# Altium PCB F4SDR2.PcbDoc (part 2 of 3)
Units mil, origin at the board's own origin, x right, y up, seen from the top; angles counter-clockwise.
Board outline 1676.41 x 2432 mil, 6 copper layers (Top Layer, GND1, PWR, PWR2/GND2, Signal Layer 1, Bottom Layer), stack 46.185 mil thick; 213 components, 239 nets, 1245 pads, 805 vias.
Unrouted connection lines stored in the file: 91.
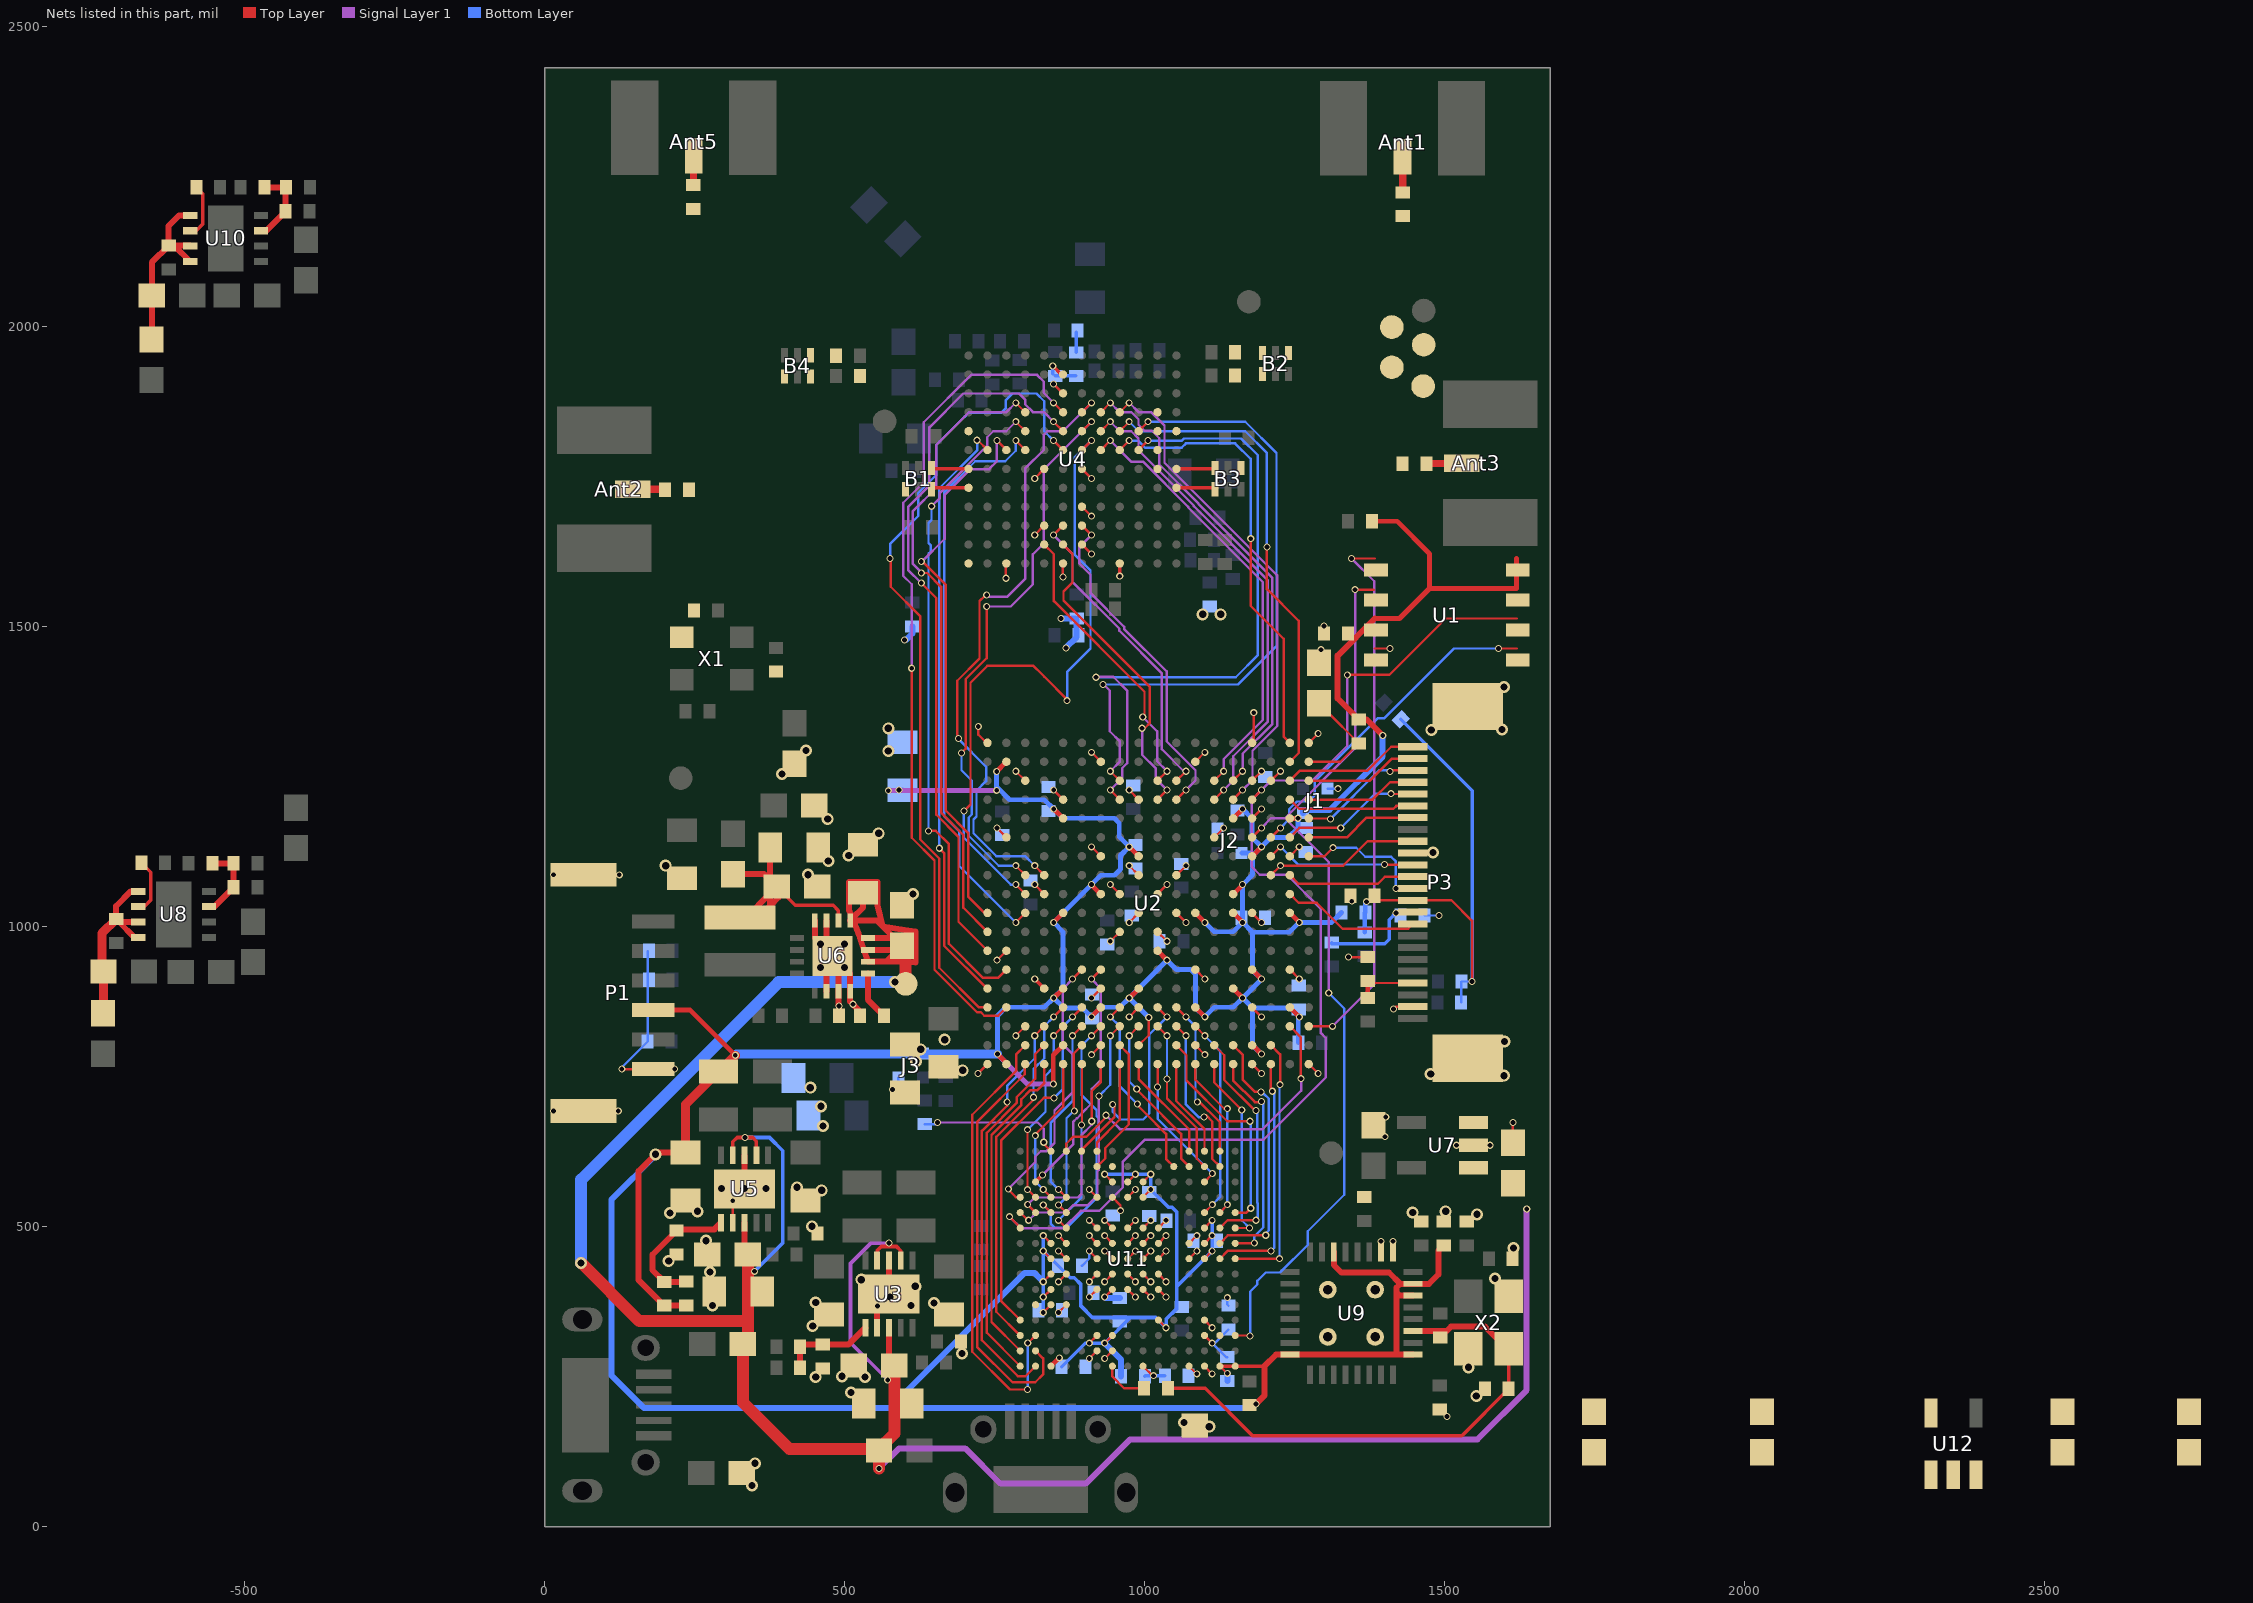
[diagram p6: the nets of this part, all layers, seen from the top]

## Via types
v1: diameter 11.81, hole 7.87, Top Layer to Bottom Layer, 680 vias
v2: diameter 20, hole 12, Top Layer to Bottom Layer, 104 vias
v3: diameter 19.68, hole 11.81, Top Layer to Bottom Layer, 20 vias
v4: diameter 12, hole 8, Top Layer to Bottom Layer, 1 vias

## Nets (pads, with @x,y where several pads share a name; then routed paths per layer and width w, separated by ;. In a path a pad name is that pad's centre, name@x,y a point inside that pad or via, vN(x,y) a via of type N, cw(c..) or ccw(c..) an arc to the next point about the centre after c; other vN are vias at no path point) (continued)
3.3D: C4.2 C5.2 C6.2 C8.1 C9.2 C13.2 C14.2 C35.2 C68.2 C71.1 C88.1 C89.1 C92.1 C94.1 C95.1 C96.1 C97.1 C109.1 J1.1 J2.1 J3.1 L2.2 P1.4 R4.1 R7.1 R9.1 R19.2 R22.1 R26.2 R31.1 R41.2 R43.1 R51.1 R64.2 U1.3 U1.7 U1.8 U2.B1 U2.B17 U2.E2 U2.E5 U2.E9 U2.E14 U2.G4 U2.G10 U2.J2 U2.J5 U2.J12 U2.K7 U2.M4 U2.M9 U2.P5 U2.P9 U2.P10 U2.P14 U2.R2 U2.R6 U2.R12 U2.U4 U2.U9 U2.U14 U9.6 U9.16 U9.25 U9.30 U9.31 U11.C1 U11.C5 U11.C6 U11.C7 U11.C8 U11.C9 U11.F3 U11.G3 U11.G13 U11.H13 U11.J12 U11.J13 U11.K4 U11.N8 U11.N9 U11.N10 U11.P1 U11.R1 | length 9401.5
  Top Layer w4: v1(831.25,357.43) U11.C5@844.05,370.23 ; v1(831.25,383.02) U11.C6@844.05,395.82 ; v1(831.25,408.61) U11.C7@844.05,421.41 ; v1(831.25,459.8) U11.C8@844.05,447 ; v1(831.25,485.39) U11.C9@844.05,472.59 ; v1(908.02,306.25) U11.F3@920.82,319.05 ; v1(933.61,306.25) U11.G3@946.41,319.05 ; v1(933.61,587.75) U11.G13@946.41,574.95 ; U11.H13@972,574.95 v1(984.8,587.75) ; U2.J2@990.25,802.78 1007,819.53 v1(1007,849) ; U11.J12@997.59,549.36 v1(1010.39,562.16) ; U11.J13@997.59,574.95 v1(1010.39,587.75) ; U11.K4@1023.18,344.64 v1(1035.98,331.84) ; U11.N8@1099.95,447 v1(1112.75,459.8) ; U11.N9@1099.95,472.59 v1(1112.75,485.39) ; U11.N10@1099.95,498.18 v1(1112.75,510.98) ; U11.P1@1125.54,267.87 1137.41,256 v1(1138,256)
  Top Layer w6: U11.P1@1125.54,267.87 U11.R1@1151.13,267.87 1199.87,267.87
  Top Layer w8: P1.4@175.09,861.39 242.61,861.39 v1(318,786) ; v1(753.56,1259) U2.B17@769.78,1275.22 ; v1(755,788) 769.78,773.22 U2.B1@769.78,771.28 ; U11.C1@844.05,267.87 v1(858,281.82) ; v1(848,738) 848,786.51 U2.E2@864.27,802.78 ; v1(848.52,881.52) U2.E5@864.27,897.27 ; v1(848.52,1007.5) U2.E9@864.27,1023.25 ; v1(848.52,1196.48) U2.E14@864.27,1180.73 ; v1(911.51,850.02) U2.G4@927.26,865.77 ; v1(911.51,1070.5) U2.G10@927.26,1054.75 ; v1(974.5,881.52) U2.J5@990.25,897.27 ; v1(974.5,1133.49) U2.J12@990.25,1117.74 ; U2.K7@1021.75,960.26 v1(1037.5,944.51) ; U2.M4@1084.74,865.77 v1(1100.49,850.02) ; U2.M9@1084.74,1023.25 v1(1100.49,1007.5) ; U2.P5@1147.73,897.27 v1(1163.48,881.52) ; U2.P9@1147.73,1023.25 v1(1163.48,1007.5) ; U2.P10@1147.73,1054.75 v1(1163.48,1070.5) ; U2.P14@1147.73,1180.73 v1(1163.48,1196.48) ; U2.R2@1179.23,802.78 1180.22,802.78 v1(1195,788) ; U2.R6@1179.23,928.76 v1(1194.98,913.02) ; U2.R12@1179.23,1117.74 v1(1194.98,1133.49) ; U2.U4@1242.22,865.77 v1(1258,849.99) ; U2.U9@1242.22,1023.25 v1(1258,1007.47) ; U2.U14@1242.22,1180.73 v1@1256.27,1180.73 ; v1(1256,1181) v1@1256.27,1180.73 ; v1@1257.9,1180.73 v1@1256.27,1180.73 ; R19.2@1379,1676 1421,1676 1475,1622 1475,1564 ; 1383.89,1514 1425,1514 1475,1564 ; 1620.11,1614 1620.11,1564 1475,1564
  Top Layer w10: C9.2@235,624 188,624 v2(185,621) 157,593 157,411.16 C8.1@199.29,368.87 R7.1@235.55,368.87 ; v1(1186,205) 1199.87,218.87 1199.87,267.87 1219.1,287.1 U9.16@1242.64,287.1 U9.25@1447.36,287.1 ; U9.6@1315.47,458.36 1315.47,436.53 1328,424 1407.42,424 1426.21,405.21 ; 1383.89,1514 1322,1452.11 1322,1380.68 R43.1@1357,1345.68 1370.32,1345.68 v1(1397,1319) ; 1420,289.1 1420,391 ; U9.30@1447.36,385.53 1425.47,385.53 1420,391 ; C109.1@1499,469.32 1490,460.32 1490,421 1474.21,405.21 U9.31@1447.36,405.21 1426.21,405.21 ; 1420,391 1420,399 1426.21,405.21
  Top Layer w15: C9.2@235,624 235,704 L2.2@290,759 291,759 v1(318,786)
  Signal Layer 1 w8: v1(573,1227) 573.56,1227.56 v1(753.56,1227.56) ; v1(755,788) 805,738 v1(848,738) ; v1(1256,1181) v1@1257.63,1181
  Bottom Layer w6: v1(831.25,357.43) v1(831.25,383.02) v1(831.25,408.61) 831.25,459.75 C5.2@856,435 876,415 883,415 894,404 894,368 913,349 976.36,349 ; v1(831.25,459.8) v1(831.25,485.39) ; C35.2@862,267 901.25,306.25 v1(908.02,306.25) v1(933.61,306.25) 976.36,349 ; v1(933.61,587.75) v1(984.8,587.75) v1(1010.39,587.75) v1(1010.39,562.16) 1039.54,533 1045.22,533 1054,524.22 1054,401.05 ; v1(1112.75,510.98) v1(1112.75,485.39) v1(1112.75,459.8) 1054,401.05 ; 976.36,349 1018.82,349 v1(1035.98,331.84) 1035.98,345.98 1054,364 1054,401.05
  Bottom Layer w8: v1(591,1228) C71.1@597,1228 ; v1(753.56,1227.56) v1@753.56,1233.44 ; v1(753.56,1259) v1@753.56,1233.44 ; v1(755,788) 755,852 769,866 833,866 v1(848.52,881.52) ; v1(1007,849) v1(974.5,881.52) ; v1(1100.49,1007.5) 1115.99,992 1147.98,992 v1(1163.48,1007.5) ; J2.1@1162,1123 1175.51,1123 1180,1118.51 ; v1(1163.48,1196.48) 1179,1180.96 1179,1149.46 v1(1194.98,1133.49) ; v1(1195,788) 1180,803 1180,865 ; v1(1256,1181) 1256,1165 1240,1149 1210.49,1149 v1(1194.98,1133.49) ; R9.1@1256.32,807 v1@1256.32,848.31 ; v1(1258,849.99) 1242.99,865 1180,865 ; R31.1@1328.32,1024 1311.79,1007.47 v1(1258,1007.47) 1241.51,990.98 1180,990.98 ; v1@753.56,1233.44 775,1212 833,1212 v1(848.52,1196.48) 864,1181 950,1181 958,1173 958,1149.99 v1(974.5,1133.49) 960,1118.98 960,1096 950,1086 927.02,1086 v1(911.51,1070.5) v1(848.52,1007.5) 864,992.02 864,897 v1(848.52,881.52) ; v1(848.52,881.52) 865.04,865 896.54,865 v1(911.51,850.02) 927.49,866 958.98,866 v1(974.5,881.52) ; v1(974.5,881.52) v1(1037.5,944.51) 1053.01,929 1077,929 1085,921 1085,865.51 v1(1100.49,850.02) 1116.46,866 1147.96,866 v1(1163.48,881.52) ; v1(1163.48,881.52) v1(1194.98,913.02) 1180,927.99 1180,990.98 ; v1(1163.48,881.52) 1180,865 ; v1(1163.48,1007.5) v1(1163.48,1070.5) 1180,1087.02 1180,1118.51 ; v1(1163.48,1007.5) 1180,990.98 ; 1180,1118.51 v1(1194.98,1133.49)
  Bottom Layer w10: v2(185,621) 185,619 112,546 112,252 166,198 574.92,198 ; v1(831.25,408.61) 816.96,422.91 799.83,422.91 574.92,198 ; v1(933.61,306.25) 961,278.86 R26.2@961,251 ; R4.1@1138,243.32 v1(1138,256) ; v1(1186,205) 1179,198 574.92,198 ; J1.1@1264,1190 1264,1194.91 1308.28,1194.91 1397,1283.63 v1(1397,1319)
  Bottom Layer w15: v1(318,786) 320,788 v1(755,788)
  other v2: 619,776 627,796
3.3OSC: C93.1 C102.2 U12.5 X1.4
5V: C1.2 C2.2 C20.2 C26.2 C39.1 C40.1 C103.2 R46.1 R48.1 R50.1 R60.1 T13.1 U3.3 U3.7 U3.9 U5.3 U5.7 U5.9 U6.10 U6.11 U6.12 U6.13 U12.1 U12.3 | length 4997.1
  Top Layer w6: U5.9@313.69,619.28 313.69,641.69 321,649 v1(334,649) 347,649 353.06,642.94 U5.7@353.06,619.28 ; U3.9@554.35,444.13 554.35,460.66 561,467.31 v1@574,467.31 ; v1(574,473) v1@574,467.31 ; U3.7@593.72,444.13 593.72,460.28 586.69,467.31 v1@574,467.31
  Top Layer w10: C1.2@333.38,459.62 U5.3@333.38,507.04 ; U6.11@539.03,961.61 C40.1@589.07,961.61 ; U6.12@539.03,981.29 C40.1@583.24,981.29 ; C20.2@574.03,277.97 U3.3@574.03,331.88 ; C39.1@507.87,1074.8 555.12,1074.8 555.12,1035.43 563.76,1000.77 ; C39.1@507.87,1074.8 507.87,1027.56 U6.13@513.12,1014.44 ; C39.1@507.87,1074.8 C39.1@531,1057 531,1032.31 U6.13@513.12,1014.44 ; U6.13@513.12,1014.44 513.87,1012.57 514.57,1010.82 ; U6.13@513.12,1014.44 U6.13@509.5,1010.82 514.57,1010.82 ; 514.57,1010.82 553.72,1010.82 563.76,1000.77 ; 514.57,1010.82 523.62,988.19 527.23,977.36 533.13,959.64 U6.10@539.03,941.92 ; U6.10@539.03,941.92 602,941.14 618.11,940.94 618.11,992.13 600.21,994.97 563.76,1000.77 ; U6.10@539.03,941.92 569.39,941.92 C40.1@589.07,961.61 ; 563.76,1000.77 C40.1@583.24,981.29 ; C40.1@583.24,981.29 C40.1@596,968.54 C40.1@589.07,961.61
  Top Layer w20: v2(61,440) 158,343 339,343 ; R48.1@330.46,305 330.46,207.54 408,130 557.54,130 583,155.46 C20.2@583,269 ; R48.1@339,313.54 339,343 ; C1.2@339,454 339,343 ; v1(557.54,97.46) R46.1@557.54,127 ; T13.1@602,905 602,941.14 C40.1@602,962.54
  Signal Layer 1 w6: v1(572,245) 510,307 510,439 544,473 v1(574,473)
  Signal Layer 1 w10: v1(557.54,97.46) 591.07,131 701,131 760,72 902,72 976,146 1555,146 1637,228 v1(1637,530)
  Bottom Layer w6: v1(334,649) 375,649 397,627 397,473 v1(350,426)
  Bottom Layer w20: v2(61,440) 61,578.85 390.15,908 v2(584,908)
_HSWAPEN: R45.1 U11.C15 | length 246.1
  Top Layer w4: v1(832,641) 832,638.18 U11.C15@844.05,626.13
  Signal Layer 1 w4: v1(655,674) 822,674 832,664 v1(832,641)
  Bottom Layer w4: R45.1@634,671.32 652.32,671.32 v1(655,674)
AD936X_CS: U2.A9 U4.K6 | length 928.2
  Top Layer w4: v1@630,1609 669,1570 669,1193.69 706,1156.69 706,1050.69 733.43,1023.25 U2.A9@738.28,1023.25 ; v1(754.02,1810.5) U4.K6@769.76,1794.75
  Signal Layer 1 w4: v1(628,1609) 629,1609 667,1647 667,1720 710,1763 741,1763 754.02,1776.02 v1(754.02,1810.5)
AD936X_MISO: U2.A5 U4.L6 | length 997.6
  Top Layer w4: v1(658,1131) 666,1123 666,968.69 737.42,897.27 U2.A5@738.28,897.27 ; v1(721,1811) 722.02,1811 U4.L6@738.27,1794.75
  Bottom Layer w4: v1(658,1131) 658,1731 721,1794 v1(721,1811)
AD936X_MOSI: U2.A8 U4.J4 | length 1071.3
  Top Layer w4: v1(628.09,1589.74) 637.94,1589.74 661,1566.69 661,1190.37 698,1153.37 698,1032.04 U2.A8@738.28,991.76 ; v1(785.51,1873.49) U4.J4@801.26,1857.74
  Signal Layer 1 w4: v1(628.09,1589.74) v1@629.26,1589.74 ; v1@630,1589 v1@629.26,1589.74 ; v1(785.51,1873.49) 770.02,1858 708,1858 653,1803 653,1732 614,1693 614,1605 v1@629.26,1589.74
AD936X_SCLK: U2.B6 U4.J5 | length 1119.6
  Top Layer w4: v1(640,1160) 652,1160 674,1138 674,972 731,915 756.02,915 U2.B6@769.78,928.76 ; v1(785.51,1841.99) U4.J5@801.26,1826.24
  Signal Layer 1 w4: v1@650,1701 v1(645,1701) 659,1715 659,1723.31 738,1802.31 738,1816 748,1826 769.52,1826 v1(785.51,1841.99)
  Bottom Layer w4: v1(640,1160) 640,1622.16 643.91,1626.07 643.91,1635.93 640,1639.84 640,1673 645,1678 v1(645,1701)
CCLK: U1.6 U2.R15 U11.A10 | length 1888.2
  Top Layer w4: v1(775,517) 792.87,499.13 U11.A10@792.87,498.18 ; U2.R15@1179.23,1212.23 v1(1194.98,1227.98) ; v1(1338,1420) 1408,1420 1502,1514 1620.11,1514
  Signal Layer 1 w4: v1(775,517) 794,498 865,498 894,527 925,527 964,566 964,609 1000,645 1198,645 1302,749 1302,815 1294,823 1294,1030 1237,1087 1192,1087 1179,1100 1179,1212 v1(1194.98,1227.98) 1211,1244 1280,1244 1338,1302 v1(1338,1420)
CLK_24M: C15.2 C108.2 R61.2 U9.27 X2.3 | length 878.1
  Top Layer w6: C15.2@1039,231 1101,231 1180,152 1529,152 C108.2@1607,230 X2.3@1607,297
  Top Layer w10: U9.27@1447.36,326.47 1503.47,326.47 1511,334 1567.26,334 1604.26,297 X2.3@1607,297
CLKOUT: U2.C9 U4.J6 | length 975.8
  Top Layer w4: v1(785.51,1810.5) U4.J6@801.26,1794.75 ; v1(785.53,1007.5) U2.C9@801.28,1023.25
  Bottom Layer w4: v1(785.51,1810.5) 785.51,1793.51 768,1776 718,1776 666,1724 666,1185 691,1160 691,1102.03 v1(785.53,1007.5)
CLOCK40M: C113.2 U4.M12
CTRL_IN0: U2.H16 U4.C5 | length 1080.9
  Top Layer w4: v1(943.01,1259.47) U2.H16@958.76,1243.72 ; U4.C5@990.24,1826.24 v1(1005.98,1841.99)
  Signal Layer 1 w4: v1(931,1404) 932,1404 942,1394 942,1326 959,1309 959,1275.46 v1(943.01,1259.47)
  Bottom Layer w4: v1(931,1404) 1156,1404 1220,1468 1220,1790 1168.01,1841.99 v1(1005.98,1841.99)
CTRL_IN1: U2.H15 U4.C6 | length 1102.4
  Top Layer w4: v1(943.01,1227.98) U2.H15@958.76,1212.23 ; U4.C6@990.24,1794.75 v1(1005.98,1810.5)
  Signal Layer 1 w4: v1(919,1416) 920,1417 948,1417 971,1394 971,1272.8 962.6,1264.4 962.6,1247.57 v1(943.01,1227.98)
  Bottom Layer w4: v1@915,1416 v1(919,1416) 1152,1416 1189,1453 1189,1786 1161.09,1813.91 1065.75,1813.91 1062.35,1810.5 v1(1005.98,1810.5)
CTRL_IN2: U2.U18 U4.D6 | length 744.2
  Top Layer w4: U4.D6@958.74,1794.75 v1(974.49,1810.5) ; v1(1177,1647) 1177,1535 1231.81,1480.19 1231.81,1317.13 U2.U18@1242.22,1306.72
  Bottom Layer w4: v1(974.49,1810.5) 989.5,1810.5 994.08,1805.92 994.08,1805.56 1001.05,1798.59 1062.09,1798.59 1062.09,1798.93 1069.07,1805.91 1151.09,1805.91 1177,1780 v1(1177,1647)
CTRL_IN3: U2.U17 U4.D5 | length 816.2
  Top Layer w4: U4.D5@958.74,1826.24 v1(974.49,1841.99) ; v1(1204,1633) 1204,1563 1257,1510 1257,1290 U2.U17@1242.22,1275.22
  Bottom Layer w4: v1(974.49,1841.99) 990.48,1826 1168,1826 1204,1790 v1(1204,1633)
CTRL_OUT0: U2.P15 U4.D4 | length 828.5
  Top Layer w4: U4.D4@958.74,1857.74 v1(974.49,1873.49) ; U2.P15@1147.73,1212.23 v1(1163.48,1227.98)
  Signal Layer 1 w4: v1(974.49,1873.49) 989.98,1858 1011,1858 1033.31,1835.69 1033.31,1773.69 1098,1709 1221.19,1585.81 1221.19,1334.87 1180,1293.69 1180,1244.5 v1(1163.48,1227.98)
CTRL_OUT1: U2.P16 U4.E4 | length 809.5
  Top Layer w4: U4.E4@927.24,1857.74 v1(942.99,1873.49) ; U2.P16@1147.73,1243.72 v1(1163.48,1259.47)
  Signal Layer 1 w4: v1(942.99,1873.49) 958.48,1858 978,1858 990,1846 990,1837 1000,1827 1012,1827 1024.66,1814.34 1024.66,1771.03 1090,1705.69 1090,1704.63 1213.19,1581.44 1213.19,1338.19 1163.48,1288.48 v1(1163.48,1259.47)
CTRL_OUT2: U2.N15 U4.E5 | length 808.6
  Top Layer w4: U4.E5@927.24,1826.24 v1(942.99,1841.99) ; U2.N15@1116.24,1212.23 v1(1131.98,1227.98)
  Signal Layer 1 w4: v1(942.99,1841.99) 958.98,1826 978,1826 990,1814 990,1794.37 1082,1702.37 1082,1701.31 1205.19,1578.13 1205.19,1341.5 1148,1284.31 1148,1243.99 v1(1131.98,1227.98)
CTRL_OUT3: U2.N16 U4.E6 | length 739.3
  Top Layer w4: U4.E6@927.24,1794.75 v1(942.99,1810.5) ; U2.N16@1116.24,1243.72 v1(1131.98,1259.47)
  Signal Layer 1 w4: v1(942.99,1810.5) 978.49,1775 998.06,1775 1073,1700.06 1073,1699 1197.19,1574.81 1197.19,1344.81 1131.98,1279.61 v1(1131.98,1259.47)
CTRL_OUT4: U2.C10 U4.F6 | length 1094
  Top Layer w4: v1(699,1193) 710,1204 710,1407 738,1435 815,1435 821.09,1428.91 821.25,1428.91 832.91,1417.25 832.91,1417.09 v1@871,1379 ; v1(785.53,1070.5) U2.C10@801.28,1054.75 ; U4.F6@895.75,1794.75 v1(911.5,1810.5)
  Bottom Layer w4: v1(699,1193) 699,1148.69 777.19,1070.5 v1(785.53,1070.5) ; v1(871,1377) 871,1425 910,1464 910,1594 884,1620 884,1783 v1(911.5,1810.5)
CTRL_OUT5: U2.C11 U4.F5 | length 956
  Top Layer w4: v1(695,1290) 701.91,1296.91 701.91,1310.59 702,1310.69 702,1413 737,1448 v1(737,1534) ; v1(785.53,1101.99) U2.C11@801.28,1086.24 ; U4.F5@895.75,1826.24 v1(911.5,1841.99)
  Signal Layer 1 w4: v1(737,1534) 777,1534 780,1537 814,1571 814,1621 832,1639 832,1762.5 v1(911.5,1841.99)
  Bottom Layer w4: v1(695,1290) 695,1261 712,1244 712,1187.31 707,1182.31 707,1152 757.01,1101.99 v1(785.53,1101.99)
CTRL_OUT6: U2.D11 U4.F4 | length 1051.6
  Top Layer w4: v1@694,1314 688,1320 688,1410.31 725,1447.31 725,1543 734,1552 736,1552 v1(737,1553) ; v1(817.02,1101.99) U2.D11@832.77,1086.24 ; U4.F4@895.75,1857.74 v1(911.5,1873.49)
  Signal Layer 1 w4: v1(737,1553) 737,1550 771,1550 801,1580 801,1764 832,1795 832,1820 837.99,1825.99 864,1825.99 v1(911.5,1873.49)
  Bottom Layer w4: v1(690,1314) 690,1313 736,1267 736,1243 720,1227 720,1184 715,1179 715,1156 753,1118 801.02,1118 v1(817.02,1101.99)
CTRL_OUT7: U2.B4 U4.G4 | length 1401.1
  Top Layer w4: 612,1425 612,1148.69 650,1110.69 650,928.69 720.91,857.77 727.23,857.77 733,852 756.01,852 U2.B4@769.78,865.77 ; v1(848.5,1873.49) U4.G4@864.25,1857.74
  Signal Layer 1 w4: v1(612,1431) 612,1571 598,1585 598,1707 632,1741 632,1841 711,1920 821,1920 832,1909 832,1889.99 v1(848.5,1873.49)
D0: P3.24 U2.U16 | length 228.4
  Top Layer w4: U2.U16@1242.22,1243.72 1258.5,1260 1371,1260 1411.18,1300.18 P3.24@1447.23,1300.18
D1: P3.23 U2.V16 | length 188.7
  Top Layer w4: U2.V16@1273.72,1243.72 1375.72,1243.72 1412.5,1280.5 P3.23@1447.23,1280.5
D2: P3.19 U2.U15 | length 213.3
  Top Layer w4: U2.U15@1242.22,1212.23 1257.45,1197 1415,1197 1419.76,1201.76 P3.19@1447.23,1201.76
D3: P3.21 U2.V15 | length 185.5
  Top Layer w4: U2.V15@1273.72,1212.23 1380.23,1212.23 1409.13,1241.13 P3.21@1447.23,1241.13
D4: P3.22 U2.V14 | length 210.9
  Top Layer w4: U2.V14@1273.72,1180.73 1309.27,1180.73 v1(1310,1180) ; v1(1409,1259) 1408,1260 1408.81,1260.81 P3.22@1447.23,1260.81
  Bottom Layer w4: v1(1310,1180) 1391,1261 1407,1261 v1(1409,1259)
D5: P3.20 U2.U13 | length 235.4
  Top Layer w4: U2.U13@1242.22,1149.24 1257.98,1165 v1(1327,1165) ; v1(1411,1222) 1411.56,1221.44 P3.20@1447.23,1221.44
  Bottom Layer w4: v1(1327,1165) 1384,1222 v1(1411,1222)
D6: P3.18 U2.V13 | length 187.1
  Top Layer w4: U2.V13@1273.72,1149.24 1337.24,1149.24 1370.07,1182.07 P3.18@1447.23,1182.07
D7: P3.16 U2.T11 | length 259.9
  Top Layer w4: U2.T11@1210.72,1086.24 v1(1226.47,1101.99) 1330.99,1101.99 1371.7,1142.7 P3.16@1447.23,1142.7
D8: P3.14 U2.T12 | length 255.5
  Top Layer w4: U2.T12@1210.72,1117.74 v1(1226.47,1133.49) ; v1(1400,1104) 1400.67,1103.33 P3.14@1447.23,1103.33
  Bottom Layer w4: v1(1226.47,1133.49) 1255.96,1104 v1(1400,1104)
D9: P3.12 U2.V12 | length 205.7
  Top Layer w4: U2.V12@1273.72,1117.74 1299.74,1117.74 v1(1314,1132)
  Bottom Layer w4: v1(1314,1132) 1353,1132 1368,1117 1411,1117 1419,1109 v1(1419,1064)
DATA: U1.2 U2.R13 U11.R3 | length 1535.2
  Top Layer w4: U11.R3@1151.13,319.05 v1@1171.95,319.05 ; v1@1176,315 v1(1176,318) ; U2.R13@1179.23,1149.24 v1(1194.98,1164.98) ; v1(1351,1562) 1381.89,1562
  Signal Layer 1 w4: v1(1194.98,1164.98) 1210.99,1181 1234,1181 ; v1(1307,890) 1307,1108 1234,1181 ; v1(1351,1562) 1351,1298 1234,1181
  Bottom Layer w4: v1(1176,318) 1176,392 1188,404 1188,410 1202,424 1226,424 1272,470 1272,492.63 1333,553.63 1333,864 v1(1307,890)
DATA_CLK_N: U2.K16 U4.H11 | length 487.4
  Top Layer w4: U4.H11@832.76,1637.27 849,1621.02 849,1543 1000,1392 1000,1353 v1(997,1350) ; U2.K16@1021.75,1243.72 v1(1037.5,1259.47)
  Signal Layer 1 w4: v1(997,1350) 1021,1326 1021,1276.19 1037.5,1259.69 v1(1037.5,1259.47)
DATA_CLK_P: U2.K15 U4.G11 | length 529
  Top Layer w4: U4.G11@864.25,1637.27 880,1621.52 880,1574 865,1559 865,1544 1008.91,1400.09 1008.91,1339.55 1000.36,1331 v1(996,1331) ; U2.K15@1021.75,1212.23 v1(1037.5,1227.98)
  Signal Layer 1 w4: v1(996,1331) 996,1286.84 1018.91,1263.93 1018.91,1246.57 v1(1037.5,1227.98)
DCMI_D2: U11.G14
DCMI_HSYNC: U11.N4 | length 18.1
  Top Layer w4: U11.N4@1099.95,344.64 v1(1112.75,331.84)
DCMI_PIXCLK: U11.P3
DCMI_VSYNC: U11.B5
DONE: LED1.1 R43.2 U2.V17 | length 180.5
  Top Layer w4: U2.V17@1273.72,1275.22 1326.22,1275.22 R43.2@1357,1306 1304,1359 LED1.1@1304,1368.54
DOVDD: C16.2 P3.11 R17.2 R31.2 R44.2 R56.1 R57.1 | length 859.1
  Top Layer w4: C16.2@1391.72,1044.28 P3.11@1447.23,1044.28 1511.72,1044.28 1546,1010 v1(1546,909)
  Bottom Layer w4: R56.1@1527.69,874 1527.69,908 R57.1@1528.69,909 v1(1546,909)
  Bottom Layer w6: R44.2@1427.14,1345.86 1546,1227 v1(1546,909)
  Bottom Layer w8: R17.2@1367,991 R31.2@1367,1023 ; R31.2@1368,1024 1368,1040 v1(1370,1042)
EN_AGC: U2.A7 U4.G5 | length 1218.6
  Top Layer w4: v1(628,1573) 653,1548 653,1187.06 690,1150.06 690,1008.54 U2.A7@738.28,960.26 ; v1(848.5,1841.99) U4.G5@864.25,1826.24
  Signal Layer 1 w4: v1(628,1573) 606,1595 606,1700 641.54,1735.54 641.54,1832.54 698,1889 791,1889 801,1879 801,1871 814,1858 832.5,1858 v1(848.5,1841.99)
ENABLE: U2.A4 U4.G6 | length 1366.2
  Top Layer w4: v1@577,1613 577,1567 626,1518 626,1146 658,1114 658,932 724.23,865.77 U2.A4@738.28,865.77 ; v1(848.5,1810.5) U4.G6@864.25,1794.75
  Bottom Layer w4: v1(576,1614) 576,1638 623,1685 623,1723 653,1753 653,1803 658,1808 658,1808.31 699.68,1849.99 699.99,1849.99 707,1857 761,1857 769,1865 769,1878 780,1889 820,1889 833,1876 833,1826 v1(848.5,1810.5)
FB_CLK_N: U2.L16 U4.G10 | length 528
  Top Layer w4: v1(848.5,1653.02) U4.G10@864.25,1668.76 ; U2.L16@1053.24,1243.72 v1(1068.99,1259.47)
  Signal Layer 1 w4: v1(848.5,1653.02) 880,1621.52 880,1575 958.09,1496.91 958.09,1493.44 1029,1422.54 1029,1296 v1@1065.53,1259.47
FB_CLK_P: U2.L15 U4.F10 | length 565.1
  Top Layer w4: U4.F10@895.75,1668.76 v1(911.5,1653.02) ; U2.L15@1053.24,1212.23 v1(1068.99,1227.98)
  Signal Layer 1 w4: v1(911.5,1653.02) 891,1632.52 891,1606 910,1587 910,1556.31 966.09,1500.22 966.09,1496.75 1037,1425.85 1037,1309 1085,1261 1085,1243.98 v1(1068.99,1227.98)
FLASH_CS: U1.1 U2.V3 | length 902.8
  Top Layer w4: U2.V3@1273.72,834.28 v1(1313.28,834.28) ; v1(1345,1614) 1383.89,1614
  Signal Layer 1 w4: v1(1313.28,834.28) 1383,904 1383,1576 v1(1345,1614)
FLASH_DI: U1.5 U2.T13 | length 562.9
  Top Layer w4: U2.T13@1210.72,1149.24 v1(1226.47,1164.98) ; v1(1590,1464) 1620.11,1464
  Bottom Layer w4: v1(1226.47,1164.98) 1241,1179.51 1241,1196 1254,1209 1273,1209 1284,1220 1284,1243 1389,1348 1400,1348 1516,1464 v1(1590,1464)
FPGA_CLK: U2.H1 U11.F15 | length 160.9
  Top Layer w4: U11.F15@920.82,626.13 920.82,640.82 958.76,678.76 U2.H1@958.76,771.28
FPGA_CLK2: U2.K4 U11.E15 | length 379.9
  Top Layer w4: U11.E15@895.23,626.13 895.23,628.23 950,683 950,700.84 v1(946.85,703.99) ; U2.K4@1021.75,865.77 v1(1037.5,850.02)
  Bottom Layer w4: v1(946.85,703.99) 946.85,692.15 960,679 998,679 1008,689 1008,820.53 v1(1037.5,850.02)
FPGA_D0: U2.F4 U11.A4 | length 600.1
  Top Layer w4: U11.A4@792.87,344.64 761,376.5 761,644 824,707 832,715 v1(849,715) ; v1(880.02,850.02) U2.F4@895.76,865.77
  Bottom Layer w4: v1(849,715) 864,730 864,834.01 v1(880.02,850.02)
FPGA_D1: U2.E4 U11.A3 | length 611.1
  Top Layer w4: U11.A3@792.87,319.05 792.64,319.05 753,358.69 753,650 817,714 v1(815,716) ; v1(848.52,850.02) U2.E4@864.27,865.77
  Bottom Layer w4: v1(815,716) 815,763 833,781 833,834.5 v1(848.52,850.02)
FPGA_D2: U2.D1 U11.A2 | length 540.7
  Top Layer w4: U11.A2@792.87,293.46 745,341.32 745,653.31 794.84,703.16 794.84,712.68 810.07,727.91 821.45,727.91 832.77,739.23 U2.D1@832.77,771.28
FPGA_D3: U2.D2 U11.A1 | length 597.7
  Top Layer w4: U11.A1@792.87,267.87 737,323.73 737,656.63 786.84,706.47 786.84,715.99 818,747.15 818,788.01 U2.D2@832.77,802.78
FPGA_D4: U2.D3 U11.B1 | length 687.6
  Top Layer w4: v1(771.03,708.03) 771.03,701.97 729,659.94 729,311 789,251 801.59,251 U11.B1@818.46,267.87 ; v1(817.02,818.53) U2.D3@832.77,834.28
  Bottom Layer w4: v1(771.03,708.03) 771.03,735.03 817.02,781.02 v1(817.02,818.53)
FPGA_D5: U2.C1 U11.B2 | length 689
  Top Layer w4: U2.C1@801.28,771.28 800.47,770.48 800.47,754.47 721,675 721,300 780,241 818,241 831,254 831,280.91 U11.B2@818.46,293.46
FPGA_D6: U2.C2 U11.B3 | length 761.9
  Top Layer w4: U2.C2@801.28,802.78 786,787.5 786,760 713,687 713,292 776,229 v1(805,229) ; v1(805.41,306.41) 805.41,306 U11.B3@818.46,319.05
  Bottom Layer w4: v1(805,229) 805,229.18 805.41,229.59 v1(805.41,306.41)
FPGA_D7: U2.T2 U11.R8 | length 434.4
  Top Layer w4: U11.R8@1151.13,447 v1(1225,447) ; U2.T2@1210.72,802.78 1226,787.5 v1@1226,739
  Bottom Layer w4: v1(1225,447) 1225,736 v1(1226,737)
FPGA_D8: U2.T1 U11.P8 | length 406.3
  Top Layer w4: U11.P8@1125.54,447 1138.54,460 v1(1211,460) ; v1@1210.72,728.28 U2.T1@1210.72,771.28
  Bottom Layer w4: v1(1211,460) 1216,465 1216,725 1217,726 v1(1213,726)
FPGA_D9: U2.P2 U11.P9 | length 438.3
  Top Layer w4: U11.P9@1125.54,472.59 1138.95,486 v1(1202,486) ; U2.P2@1147.73,802.78 1164,786.51 1164,745 1184,725 v1(1194,725)
  Bottom Layer w4: v1(1194,725) 1194,722 1195.09,720.91 1199.93,720.91 1207,713.84 1207,494 1199,486 v1(1202,486)
FPGA_D10: U2.P1 U11.R9 | length 369.8
  Top Layer w4: U2.P1@1147.73,771.28 1147.73,744.27 1184,708 1194,708 v1(1195,709) ; U11.R9@1151.13,472.59 1182.59,472.59 v1(1183,473)
  Bottom Layer w4: v1(1183,473) 1183,484 1198,499 1198,707 1193,707 v1(1195,709)
FPGA_D11: U2.N2 U11.P10 | length 390.2
  Top Layer w4: U2.N2@1116.24,802.78 1133,786.02 1133,745 v1@1184,694 ; U11.P10@1125.54,498.18 1138.36,511 v1(1186,511) v1@1187,511
  Bottom Layer w4: v1(1186,511) 1188.91,513.91 1188.91,538.84 1188,539.74 1188,694 v1(1186,694)
FPGA_D12: U2.N1 U11.R10 | length 321.6
  Top Layer w4: U2.N1@1116.24,771.28 1116.24,740.76 v1(1162,695) ; U11.R10@1151.13,498.18 1174.82,498.18 v1(1175,498)
  Bottom Layer w4: v1(1162,695) 1162,511 v1(1175,498)
FPGA_D13: U2.M3 U11.N11 | length 338.4
  Top Layer w4: U2.M3@1084.74,834.28 v1(1100.49,818.53) ; U11.N11@1099.95,523.77 1099.95,523.95 v1(1113,537)
  Bottom Layer w4: v1(1100.49,818.53) 1126,793.02 1126,550 v1(1113,537)
FPGA_D14: U2.M1 U11.P11 | length 277.7
  Top Layer w4: U2.M1@1084.74,771.28 1084.74,745.26 1133,697 v1(1138,697) ; U11.P11@1125.54,523.77 1138,536.23 v1(1138,537)
  Bottom Layer w4: v1(1138,537) v1(1138,697)
FPGA_D15: U2.L2 U11.R11 | length 374.7
  Top Layer w4: U2.L2@1053.24,802.78 1070,786.02 1070,744 1138,676 v1(1176,676) ; U11.R11@1151.13,523.77 1169.77,523.77 v1(1177,531)
  Bottom Layer w4: v1(1176,676) 1177,676 v1(1177,531)
FPGA_IO0: U2.E3 U11.B12 | length 315.9
  Top Layer w4: v1(805,562) v1@805,562.82 ; v1(805,662) v1@805,562.82 ; U11.B12@818.46,549.36 v1@805,562.82 ; v1(848.52,818.53) U2.E3@864.27,834.28
  Bottom Layer w4: v1(805,662) 835,692 835,752 848.52,765.52 v1(848.52,818.53)
FPGA_IO1: U2.E1 U11.C12 | length 251.7
  Top Layer w4: v1(818,652) 817,653 864.27,700.27 U2.E1@864.27,771.28 ; v1(831.25,562.16) U11.C12@844.05,549.36
  Bottom Layer w4: v1@818,651 818,575.41 v1(831.25,562.16)
FPGA_IO2: U2.F3 U11.D12 | length 317
  Top Layer w4: v1(856.84,562.16) U11.D12@869.64,549.36 ; v1(880.02,818.53) U2.F3@895.76,834.28
  Bottom Layer w4: v1(856.84,562.16) 844,575 844,674 880.02,710.02 v1(880.02,818.53)
FPGA_IO3: U2.F2 U11.D11 | length 302.4
  Top Layer w4: v1(856.84,536.57) U11.D11@869.64,523.77 ; v1(883,693) 882,693 882,789.02 U2.F2@895.76,802.78
  Bottom Layer w4: v1(856.84,536.57) 870,549.73 870,681 882,693 v1(883,693)
FPGA_IO4: U2.F1 U11.D10 | length 293.4
  Top Layer w4: v1(856.84,510.98) U11.D10@869.64,498.18 ; v1@895.76,670.76 U2.F1@895.76,771.28
  Bottom Layer w4: v1(856.84,510.98) 895,549.14 v1(895,670)
FPGA_IO5: U2.G3 U11.C11 | length 467
  Top Layer w4: v1(831.25,536.57) U11.C11@844.05,523.77 ; v1(911.51,818.53) U2.G3@927.26,834.28
  Bottom Layer w4: v1(831.25,536.57) 844,523.82 844,505 850,499 871,499 920,548 920,667.16 923.91,671.07 923.91,680.93 920,684.84 920,695 895,720 895,802.02 v1(911.51,818.53)
FPGA_IO6: U2.G1 U11.B11 | length 346
  Top Layer w4: v1(805.23,537.23) 805,537.23 U11.B11@818.46,523.77 ; v1(912,676) 912,726.48 927.26,741.74 U2.G1@927.26,771.28
  Signal Layer 1 w4: v1(805.23,537.23) 817,549 889,549 895,555 895,653.16 912,670.16 v1(912,676)
FPGA_IO7: U2.H3 U11.A11 | length 448.3
  Top Layer w4: U11.A11@792.87,523.77 805.64,511 v1(807,511) ; v1(943.01,818.53) U2.H3@958.76,834.28
  Signal Layer 1 w4: v1(807,511) 820,524 869,524 881,536 905,536 921.71,552.71 921.71,592.68 924,594.97 v1(924,718)
  Bottom Layer w4: v1(924,718) 943.01,737.01 v1(943.01,818.53)
FPGA_IO8: U2.L4 U11.P15 | length 269.3
  Top Layer w4: U2.L4@1053.24,865.77 v1(1068.99,850.02) ; v1(1088,708) 1090,710 1125.54,674.46 U11.P15@1125.54,626.13
  Bottom Layer w4: v1(1068.99,850.02) 1085,834.02 v1@1085,711
FPGA_IO9: U2.L3 U11.P14 | length 275.6
  Top Layer w4: U2.L3@1053.24,834.28 v1(1068.99,818.53) ; v1(1099,683) 1102.34,686.34 1113,675.69 1113,613.09 U11.P14@1125.54,600.54
  Bottom Layer w4: v1(1068.99,818.53) 1068.99,746.01 1068.99,704.01 1090,683 v1(1099,683)
FPGA_IO10: U2.L1 U11.N15 | length 164.4
  Top Layer w4: U2.L1@1053,771.04 1053,710 1099.95,663.05 U11.N15@1099.95,626.13
FPGA_IO11: U2.K3 U11.N14 | length 266.1
  Top Layer w4: U2.K3@1021.75,834.28 v1(1037.5,818.53) ; v1(1037.5,746.5) 1037.5,714.19 1087,664.69 1087,613.5 U11.N14@1099.95,600.54
  Bottom Layer w4: v1(1037.5,746.5) v1(1037.5,818.53)
FPGA_IO12: U2.K1 U11.N13 | length 239.2
  Top Layer w4: v1(1021.75,733.25) U2.K1@1021.75,771.28 ; U11.N13@1099.95,574.95 1113,588 v1(1113,589)
  Bottom Layer w4: v1@1022,733 1022,680 v1(1113,589)
FPGA_IO13: U2.J1 U11.M15 | length 180
  Top Layer w4: U2.J1@990.25,771.28 990.25,746.75 1074.36,662.64 U11.M15@1074.36,626.13
FPGA_IO14: U2.J3 U11.M14 | length 281.6
  Top Layer w4: v1(974.5,818.53) U2.J3@990.25,834.28 ; v1(987,730) 987,729 999,717 1061,655 1061,613.91 U11.M14@1074.36,600.54
  Bottom Layer w4: v1(974.5,818.53) 974.5,742.5 v1(987,730)
FPGA_IO15: U2.H4 U11.L14 | length 315.6
  Top Layer w4: v1(943.01,850.02) U2.H4@958.76,865.77 ; v1(988,705) 988,703 1000,691 1036,655 1036,613.32 U11.L14@1048.77,600.54
  Bottom Layer w4: v1(943.01,850.02) 959,834.03 959,734 v1(988,705)
FPGA_MCLK: U2.H2 U11.F14 | length 230.6
  Top Layer w4: U11.F14@920.82,600.54 934.5,614.23 934.5,631.5 974,671 974,787.54 U2.H2@958.76,802.78
GND: C1.1 C2.1 C3.1 C4.1 C5.1 C6.1 C7.1 C9.1 C10.1 C11.1 C12.1 C13.1 C14.1 C16.1 C20.1 C26.1 C29.1 C30.1 C32.1 C35.1 C36.1 C37.1 C38.1 C39.2 C40.2 C41.1 C42.1 C44.2 C45.1 C46.1 C48.2 C55.2 C68.1 C71.2 C76.2 C79.2 C81.2 C87.2 C88.2 C89.2 C90.2 C91.2 C92.2 C94.2 C95.2 C96.2 C97.2 C98.2 C99.2 C100.2 C101.2 C102.1 C103.1 C108.1 C109.2 C110.1 C111.2 C112.2 J1.3 J2.3 J3.3 LED1.2 P1.0 P1.6 P3.0 P3.2 P3.15 R2.2 R3.2 R6.2 R10.2 R11.2 R13.1 R14.2 R16.2 R18.2 R47.2 R49.1 R52.2 R53.2 R54.2 R55.2 R62.1 U1.4 U2.A1 U2.A18 U2.B7 U2.B13 U2.C3 U2.C16 U2.D5 U2.D10 U2.E15 U2.G2 U2.G5 U2.G12 U2.G17 U2.H8 U2.H10 U2.J4 U2.J9 U2.J11 U2.J15 U2.K8 U2.K10 U2.L9 U2.L11 U2.M2 U2.M6 U2.M17 U2.N13 U2.R1 U2.R4 U2.R9 U2.R14 U2.R16 U2.R18 U2.T16 U2.U6 U2.U12 U2.V1 U2.V18 U3.2 U3.8 U3.11 U4.D12 U4.F7 U4.F9 U4.F11 U4.G12 U4.H7 U4.H10 U4.K12 U5.2 U5.8 U5.11 U6.0 U6.6 U6.7 U6.8 U6.15 U6.16 U7.2 U9.0 U9.1 U9.2 U11.D5 U11.D7 U11.D8 U11.D9 U11.F2 U11.F6 U11.F7 U11.F8 U11.F9 U11.F10 U11.F12 U11.G2 U11.G6 U11.G7 U11.G8 U11.G9 U11.G10 U11.G12 U11.H6 U11.H7 U11.H8 U11.H9 U11.H10 U11.H12 U11.J6 U11.J7 U11.J8 U11.J9 U11.J10 U11.K6 U11.K7 U11.K8 U11.K9 U11.K10 U11.M1 U11.M8 U11.M9 U11.N1 U12.2 X2.2 X2.4 | length 3368
  Top Layer w4: P1.0@13.91,693.09 P1.0@14.91,693.09 ; v1(15,693) P1.0@14.91,693.09 ; v1(15,1087) 14.42,1087 14.21,1086.79 v1(124.79,1086.79) ; v1(122.91,693.09) P1.0@14.91,693.09 ; v1(128.97,762.97) v1(216.97,762.97) ; U5.2@313.69,507.04 v1(313.69,543.48) ; U3.11@554.35,368.32 554.68,368.32 v1(555,368) ; C7.1@674,354 C7.1@674,369 ; v1(722.54,755.54) U2.A1@738.28,771.28 ; v1(723,1334) 723,1320.57 737.57,1306 U2.A18@738.28,1306.72 ; v1(754.03,944.51) U2.B7@769.78,960.26 ; v1(754.03,1164.98) U2.B13@769.78,1149.24 ; v1(769,1581) 769,1605.01 U4.K12@769.76,1605.77 ; v1(785.53,818.53) U2.C3@801.28,834.28 ; v1(785.53,1259.47) U2.C16@801.28,1243.72 ; v1(817.02,1070.5) U2.D10@832.77,1054.75 ; v1(817.01,1653.02) U4.H10@832.76,1668.76 ; v1(817.01,1747.5) U4.H7@832.76,1763.25 ; v1(848.52,1227.98) U2.E15@864.27,1212.23 ; v1(856.84,357.43) U11.D5@869.64,370.23 ; v1(856.84,408.61) U11.D7@869.64,421.41 ; v1(856.84,459.8) U11.D8@869.64,447 ; v1(856.84,485.39) U11.D9@869.64,472.59 ; v1(864,1583) 864,1605.52 U4.G12@864.25,1605.77 ; U4.F11@895.75,1637.27 v1(911.5,1621.52) ; U4.F9@895.75,1700.26 v1(911.5,1684.51) ; U4.F7@895.75,1763.25 v1(911.5,1747.5) ; v1(908.02,280.66) U11.F2@920.82,293.46 ; v1(908.02,383.02) U11.F6@920.82,395.82 ; v1(908.02,408.61) U11.F7@920.82,421.41 ; v1(908.02,459.8) U11.F8@920.82,447 ; v1(908.02,485.39) U11.F9@920.82,472.59 ; v1(908.02,510.98) U11.F10@920.82,498.18 ; v1(908.02,562.16) U11.F12@920.82,549.36 ; v1(911.51,787.03) U2.G2@927.26,802.78 ; v1(911.51,881.52) U2.G5@927.26,897.27 ; v1(911.51,1133.49) U2.G12@927.26,1117.74 ; v1(911.51,1290.97) U2.G17@927.26,1275.22 ; v1(933.61,280.66) U11.G2@946.41,293.46 ; v1(933.61,383.02) U11.G6@946.41,395.82 ; v1(933.61,408.61) U11.G7@946.41,421.41 ; v1(933.61,459.8) U11.G8@946.41,447 ; v1(933.61,485.39) U11.G9@946.41,472.59 ; v1(933.61,510.98) U11.G10@946.41,498.18 ; v1(943.01,976.01) U2.H8@958.76,991.76 ; v1(943.01,1070.5) U2.H10@958.76,1054.75 ; U11.G12@946.41,549.36 960,535.77 v1(960,527) ; U11.H6@972,395.82 v1(984.8,383.02) ; U11.H7@972,421.41 v1(984.8,408.61) ; U11.H8@972,447 v1(984.8,459.8) ; U11.H9@972,472.59 v1(984.8,485.39) ; U11.H10@972,498.18 v1(984.8,510.98) ; U11.H12@972,549.36 v1(984.8,562.16) ; v1(974.5,850.02) U2.J4@990.25,865.77 ; v1(974.5,1007.5) U2.J9@990.25,1023.25 ; v1(974.5,1101.99) U2.J11@990.25,1086.24 ; v1(974.5,1227.98) U2.J15@990.25,1212.23 ; U11.J6@997.59,395.82 v1(1010.39,383.02) ; U11.J7@997.59,421.41 v1(1010.39,408.61) ; U11.J8@997.59,447 v1(1010.39,459.8) ; U11.J9@997.59,472.59 v1(1010.39,485.39) ; U11.J10@997.59,498.18 v1(1010.39,510.98) ; U2.K8@1021.75,991.76 v1(1037.5,976.01) ; U2.K10@1021.75,1054.75 v1(1037.5,1070.5) ; U11.K6@1023.18,395.82 v1(1035.98,383.02) ; U11.K7@1023.18,421.41 v1(1035.98,408.61) ; U11.K8@1023.18,447 v1(1035.98,459.8) ; U11.K9@1023.18,472.59 v1(1035.98,485.39) ; U11.K10@1023.18,498.18 v1(1035.98,510.98) ; U2.L9@1053.24,1023.25 v1(1068.99,1007.5) ; U2.L11@1053.24,1086.24 v1(1068.99,1101.99) ; U11.M1@1074.36,267.87 v1(1087.16,255.07) ; U11.M8@1074.36,447 v1(1087.16,459.8) ; U11.M9@1074.36,472.59 v1(1087.16,485.39) ; U2.M2@1084.74,802.78 v1(1100.49,787.03) ; U2.M6@1084.74,928.76 v1(1100.49,913.02) ; U2.M17@1084.74,1275.22 v1(1100.49,1290.97) ; U11.N1@1099.95,267.87 v1(1112.75,255.07) ; U2.N13@1116.24,1149.24 v1(1131.98,1164.98) ; U2.R1@1179.23,771.28 v1(1194.98,755.54) ; U2.R4@1179.23,865.77 v1(1194.98,850.02) ; U2.R9@1179.23,1023.25 v1(1194.98,1007.5) ; U2.R14@1179.23,1180.73 v1(1194.98,1196.48) ; U2.R16@1179.23,1243.72 v1(1194.98,1259.47) ; U2.R18@1179.23,1306.72 1182,1309.49 v1(1182,1357) ; U2.T16@1210.72,1243.72 v1(1226.47,1259.47) ; U2.U6@1242.22,928.76 v1(1257.97,913.02) ; U2.U12@1242.22,1117.74 v1(1257.97,1133.49) ; U2.V1@1273.72,771.28 v1(1289.46,755.54) ; U2.V18@1273.72,1306.72 v1(1289.46,1322.46) ; v1(1294,1462) 1294,1446 LED1.2@1304,1436 ; v1(1340,950) 1340.31,949.68 C10.1@1372,949.68 ; C16.1@1343.32,1052 1343.32,1045.01 v1(1345.48,1042.84) ; 1383.89,1464 v1(1409,1464) ; v1(1394,476) 1394,462.57 1392,460.57 U9.2@1394.21,458.36 ; v1(1401,650.46) C45.1@1382,669.46 1388.46,669.46 v1(1402,683) ; U9.1@1413.9,458.36 1415,459.46 1414,460.46 v1(1414,476) ; v1(1415,863) 1419.11,867.11 P3.2@1447.23,867.11 ; C112.2@1492,196 v1(1504,184) ; v1@1519,636 v1(1520,636) U7.2@1548.19,636 v1(1576,636) ; C46.1@1614,640.46 v1(1614,674)
  Top Layer w6: v1(817.02,913.02) U2.D5@832.77,897.27 ; v1(958.74,1584.57) U4.D12@958.74,1605.77
  Top Layer w10: U5.11@333.38,563.16 U5.8@333.38,619.28 ; U6.0@450.45,981.29 U6.16@450.45,1010.82 ; U6.6@470.13,892.71 U6.0@470.13,941.92 ; U6.0@470.13,961.61 U6.15@470.13,1010.82 ; v1@489.82,869.18 U6.7@489.82,892.71 U6.0@489.82,941.92 ; R18.2@491,852 v1(491,868) ; 509.5,875.5 U6.8@509.5,892.71 U6.0@509.5,922.24 ; v1(514,871) 526,859 C44.2@526,852 ; U3.2@554.35,331.88 U3.11@554.35,368.32 ; U3.11@574.03,388 U3.8@574.03,444.13 ; C68.1@1299.31,1489 v1(1299.31,1501.31)
  Signal Layer 1 w4: v1@14,693 v1(15,693) ; v1(555,368) v1@555,368.97 ; v1(1345.48,1042.84) v1@1346.32,1042
  Bottom Layer w4: v1(128.97,762.97) 128.97,765.97 R6.2@172,809 R2.2@172,959.82 ; v1(580,729) 589.66,738.66 J3.3@589.66,748.65 ; C5.1@895.68,435 908.02,447.34 v1(908.02,459.8) ; v1(1138,382) 1138,370.68 C12.1@1140,368.68 ; J1.3@1305.34,1230.35 v1(1322.65,1230.35) ; C11.1@1466.69,1019 v1(1491,1019)
  Bottom Layer w10: v1(600,1478) 602,1478 613,1489 R54.2@613,1501 ; v1(861,1514) R52.2@887,1514 887,1483 v1(869,1465) ; v1@934.95,381.68 C4.1@959,381.68
  other v2: 346,69 351,106 1108,167 1066,174 1553,218 511,224 452,250 534,250 496,251 1540,266 696,289 447,335 280,369 611,369 649,373 452,374 576,383 618,401 528,412 1584,414 276,425 207,443 1615,465 269,477 446,501 1554,521 209,523 1447,524 255,526 1502,526 462,561 295,564 333,564 369,564 421,566 464,668 461,701 443,732 1599,752 1477,755 697,761 1600,809 667,812 614,1055 439,1087 202,1102 473,1110 507,1119 1481,1124 557,1156 472,1180 396,1255 573,1293 436,1294 1478,1328 1596,1329 573,1331 1599,1400 1097,1521 1127,1521
  other v3: 460.29,932.08 499.66,932.08 460.29,971.45 499.66,971.45
GPO0: T4.1 U4.B7
GPO1: T5.1 U4.B6
GPO2: T6.1 U4.B5
GPO3: T7.1 U4.B4
HREF: P3.9 U2.U10 | length 232.2
  Top Layer w4: U2.U10@1242.22,1054.75 1256.97,1040 1287,1040 1330,997 1420.02,997 1420.14,997.13 1439.45,997.13 P3.9@1447.23,1004.91
INIT_B: U2.U3 U11.D15 | length 578.1
  Top Layer w4: U11.D15@869.64,626.13 869.64,638.64 881,650 903,650 938,685 937,686 v1(936,686) ; U2.U3@1242.22,834.28 1260.63,815.87 v1@1260.63,747.37
  Signal Layer 1 w4: v1(936,686) 959,663 1197,663 1261,727 v1(1261,747)
MCLK: P3.13 U2.U11 | length 215.7
  Top Layer w4: U2.U11@1242.22,1086.24 1256.46,1072 1389,1072 1400.65,1083.65 P3.13@1447.23,1083.65
MISO: U2.G6 U11.B13 | length 412.2
  Top Layer w4: v1(911.51,913.02) U2.G6@927.26,928.76
  Top Layer w6: U11.B13@818.46,574.95 v1(830,586.5)
  Signal Layer 1 w4: v1(830,586.5) 881,637.5 881,675 887.09,681.09 887.93,681.09 894.91,688.07 894.91,688.91 912.09,706.09 912.09,729.91 927,744.81 927,897.53 v1(911.51,913.02)
MON1: U4.M5
MON2: U4.A5
MOSI: U2.F6 U11.A12 | length 462.7
  Top Layer w4: v1(773,563) 772,563 785.64,549.36 U11.A12@792.87,549.36 ; v1(880.02,913.02) U2.F6@895.76,928.76
  Signal Layer 1 w4: v1(773,563) 818,608 818,617 827,626 836,626 850,640 850,694 880,724 880,788 864,804 864,897 v1(880.02,913.02)
NetAnt1_1: Ant1.1 C74.2 | length 64.3
  Top Layer w12: C74.2@1430.52,2224.13 Ant1.1@1430.52,2288.46
NetAnt2_1: Ant2.1 C69.2 | length 54
  Top Layer w10.92: C69.2@200.24,1729.38 C69.2@200.81,1728.8
  Top Layer w12: Ant2.1@147.06,1729.38 C69.2@200.24,1729.38
NetAnt3_1: Ant3.1 C78.1 | length 64.6
  Top Layer w12: C78.1@1469.87,1772.11 Ant3.1@1534.52,1772.11
NetAnt5_1: Ant5.1 C85.2 | length 54.2
  Top Layer w12: C85.2@248.17,2236.13 Ant5.1@248.17,2290.31
NetB1_1: B1.1 C69.1
NetB1_3: B1.3 U4.M8 | length 59.6
  Top Layer w6: B1.3@647.13,1731.76 U4.M8@706.77,1731.76
NetB1_4: B1.4 U4.M7 | length 60.7
  Top Layer w6: B1.4@646.12,1763.25 U4.M7@706.77,1763.25
NetB2_1: B2.1 C74.1
NetB2_3: B2.3 C72.1
NetB2_4: B2.4 C77.1
NetB3_1: B3.1 C78.2
NetB3_3: B3.3 U4.A7 | length 62.7
  Top Layer w6: U4.A7@1053.23,1763.25 B3.3@1115.88,1763.25
NetB3_4: B3.4 U4.A8 | length 61.6
  Top Layer w6: U4.A8@1053.23,1731.76 B3.4@1114.87,1731.76
NetB4_1: B4.1 C85.1
NetB4_3: B4.3 C86.2
NetB4_4: B4.4 C84.1
NetC8_2: C8.2 R7.2 R10.1 U5.1 | length 222.2
  Top Layer w10: R10.1@220,493.68 180,453.68 180,427.84 C8.2@199.29,408.55 R7.2@235.55,408.55 ; R10.1@222.32,496 282.97,496 U5.1@294.01,507.04
NetC10_2: C10.2 P3.4 R15.1 | length 104
  Top Layer w4: C10.2@1371.52,906.48 1372,906.48 P3.4@1447.23,906.48
  Top Layer w8: R15.1@1372,881.68 1372,906.48 C10.2@1372,910
NetC11_2: C11.2 P3.10 R32.1 | length 148.7
  Bottom Layer w6: R32.1@1312,973.68 1312,972.09 1400.35,972.09 1407.91,979.65 1407.91,1012 v1(1419,1023.09)
NetC12_2: C12.2 R4.2 U11.N3 | length 85.2
  Top Layer w4: U11.N3@1099.95,319.05 v1(1112.75,306.25)
  Bottom Layer w4: v1(1112.75,306.25) 1136,283 R4.2@1138,283 ; v1@1117.25,306.25 C12.2@1140,329
NetC15_1: C15.1 U11.G1 | length 78.3
  Top Layer w4: U11.G1@946.41,267.87 946.41,250.59 966,231 C15.1@999.32,231
NetC17_2: C17.2 C18.2 R21.1 U8.5 U8.7 U8.8 | length 318.4
  Top Layer w10: U8.8@-677.08,982.49 -683.64,982.49 C18.2@-709.23,1008.08 ; U8.7@-677.08,1008.08 C18.2@-709.23,1008.08 ; U8.5@-677.08,1059.26 -689.64,1059.26 -714.02,1034.87 C18.2@-714.02,1012.87 C18.2@-709.23,1008.08
  Top Layer w15: R21.1@-736.02,856.34 -735.02,857.34 C17.2@-735.02,925.87 -737.52,928.37 -737.52,989.37 C18.2@-714.02,1012.87
NetC22_2: C22.2 U8.6 | length 94.3
  Top Layer w6: U8.6@-677.08,1033.67 -667.23,1033.67 -656.02,1044.87 -656.02,1090.87 C22.2@-672.02,1106.87
NetC23_2: C23.2 C24.2 R27.1 U10.5 U10.7 U10.8 | length 315.7
  Top Layer w10: R27.1@-654.35,1979.92 C23.2@-654.35,2052.46 -654.35,2107.46 C24.2@-626.35,2135.46 ; U10.7@-591.2,2135.46 C24.2@-616.79,2135.46 ; U10.8@-590.4,2109.07 C24.2@-616.79,2135.46 ; U10.5@-590.4,2185.84 -608.96,2185.84 -626.35,2168.46 C24.2@-626.35,2135.46 ; C24.2@-626.35,2135.46 C24.2@-616.79,2135.46
NetC28_2: C28.2 U10.6 | length 91.3
  Top Layer w6: U10.6@-590.4,2160.25 -580.55,2160.25 -569.35,2171.46 -569.35,2221.46 C28.2@-580.35,2232.46
NetC31_2: C31.2 R12.2 R14.1 U3.1 | length 156.9
  Top Layer w10: R12.2@426,265 C31.2@426,300 429.68,303.68 R14.1@464,303.68 506.46,303.68 U3.1@534.66,331.88
NetC33_2: C33.2 R23.2 R24.1 U8.3 | length 129.6
  Top Layer w10: U8.3@-558.97,1033.67 -550.23,1033.67 C33.2@-518.02,1065.87 R23.2@-518.02,1105.87 R24.1@-553.34,1105.87
NetC34_2: C34.2 R29.2 R30.1 U10.3 | length 129
  Top Layer w10: U10.3@-472.29,2160.25 -463.55,2160.25 C34.2@-431.35,2192.46 -431.35,2231.52 R29.2@-430.43,2232.43 ; R30.1@-466.66,2232.46 R29.2@-432.28,2232.46
NetC36_2: C36.2 R26.1 U11.J1 | length 58.8
  Top Layer w4: U11.J1@997.59,267.87 1014,251.46 1014,251 v1(1015,252)
  Bottom Layer w6: R26.1@1000.68,251 1001.68,252 v1(1015,252) C36.2@1034,252
NetC41_2: C41.2 C42.2 L13.2 R20.2 U6.14 | length 479.8
  Top Layer w6: C41.2@387,1067 418,1036 481,1036 489.82,1027.18 U6.14@489.82,1010.82
  Top Layer w10: R20.2@314,1088 366,1088 C41.2@376,1078 ; L13.2@326,1015.74 L13.2@335.74,1015.74 ; C42.2@376,1132 C41.2@376,1078 ; C41.2@390,1049 L13.2@376,1035 ; L13.2@335.74,1015.74 L13.2@356.74,1015.74 ; L13.2@335.74,1015.74 C41.2@376,1056 ; L13.2@356.74,1015.74 L13.2@376,1035 ; L13.2@356.74,1015.74 373.74,1015.74 376,1018 L13.2@376,1035 ; L13.2@376,1035 C41.2@376,1056 ; C41.2@376,1056 C41.2@387,1067 C41.2@376,1078
NetC44_1: C44.1 U6.9 | length 81.3
  Top Layer w10: U6.9@539.03,922.24 539.03,878.65 C44.1@565.68,852
NetC46_2: C46.2 R50.2 R51.2 U7.1 U7.3
NetC62_1: C62.1 R38.1 | length 33.6
  Bottom Layer w6: R38.1@886,1957.68 C62.1@886,1991.32
NetC63_1: C63.1 R38.2 U4.G2 U4.G3 | length 92.8
  Top Layer w4: v1(848.5,1904.98) U4.G3@864.25,1889.24
  Top Layer w6: v1(847,1935) 861.27,1920.73 U4.G2@864.25,1920.73
  Bottom Layer w6: C63.1@847,1922.32 v1(847,1935) ; C63.1@851,1918.32 R38.2@885.68,1918.32